# Altium PCB Neural Stimulator.PcbDoc
Units mm, origin at the board's own origin, x right, y up, seen from the top; angles counter-clockwise.
Board outline 29.05 x 31.12 mm, 2 copper layers (Top Layer, Bottom Layer); 58 components, 48 nets, 241 pads, 52 vias.
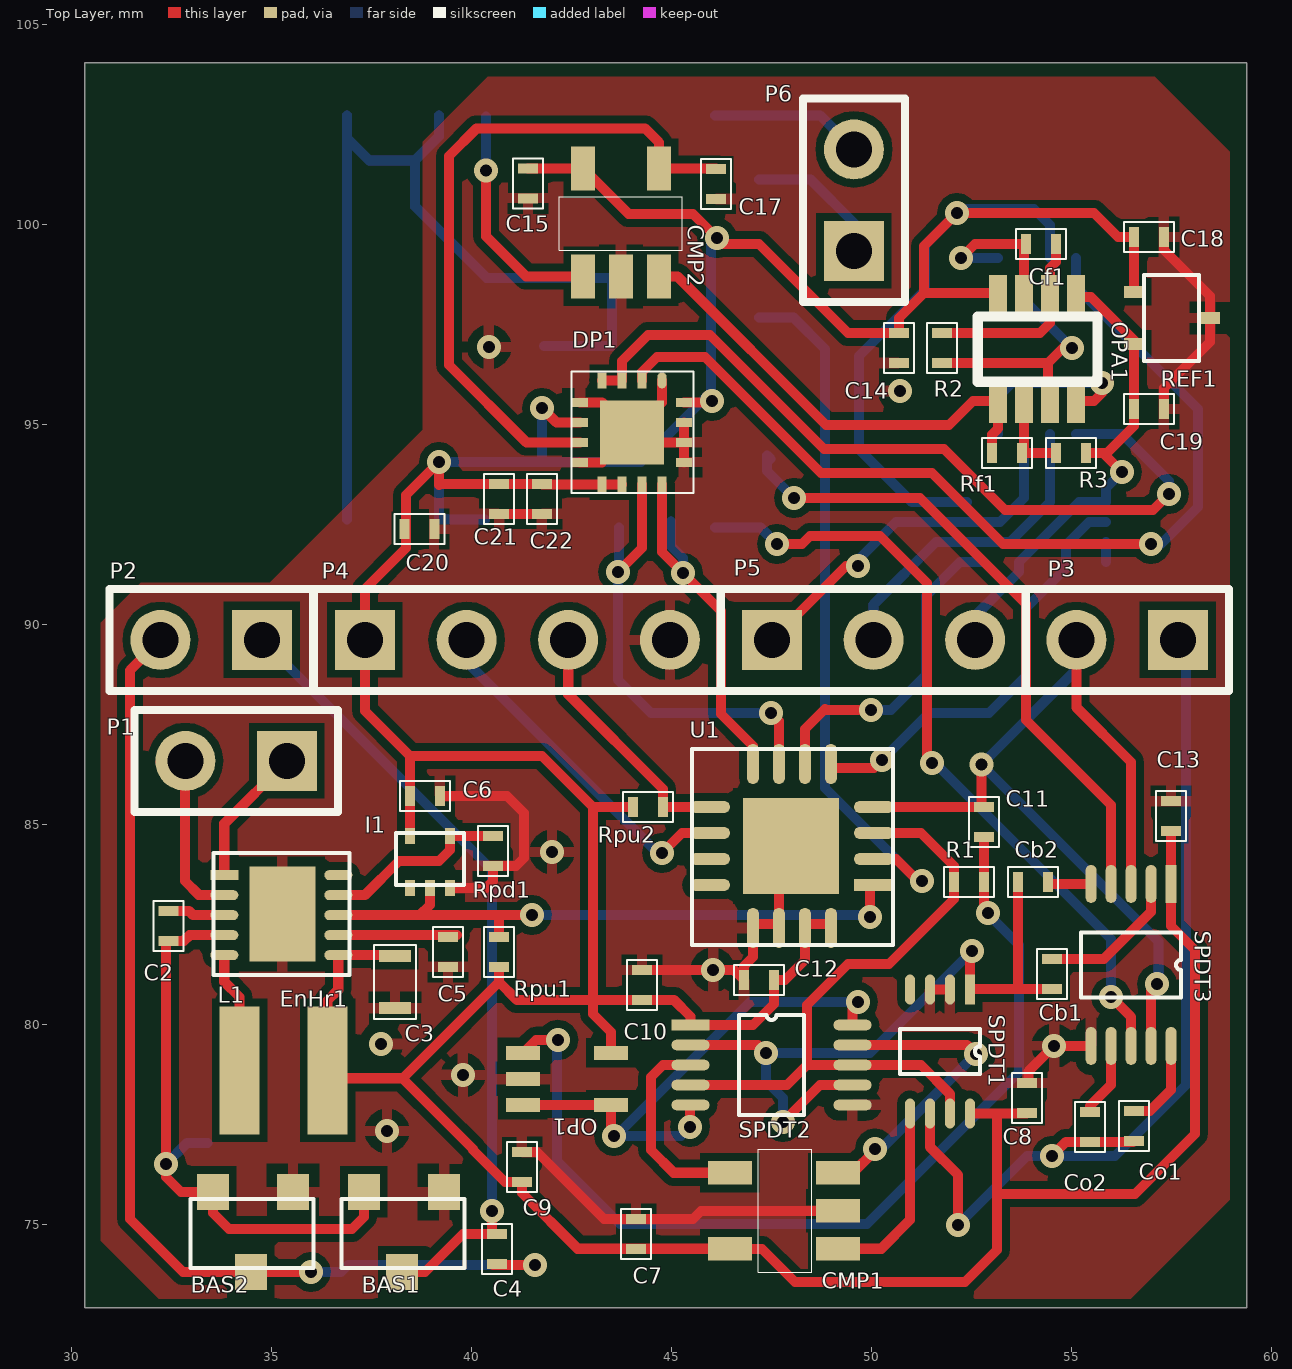
[diagram p0: Top Layer view]
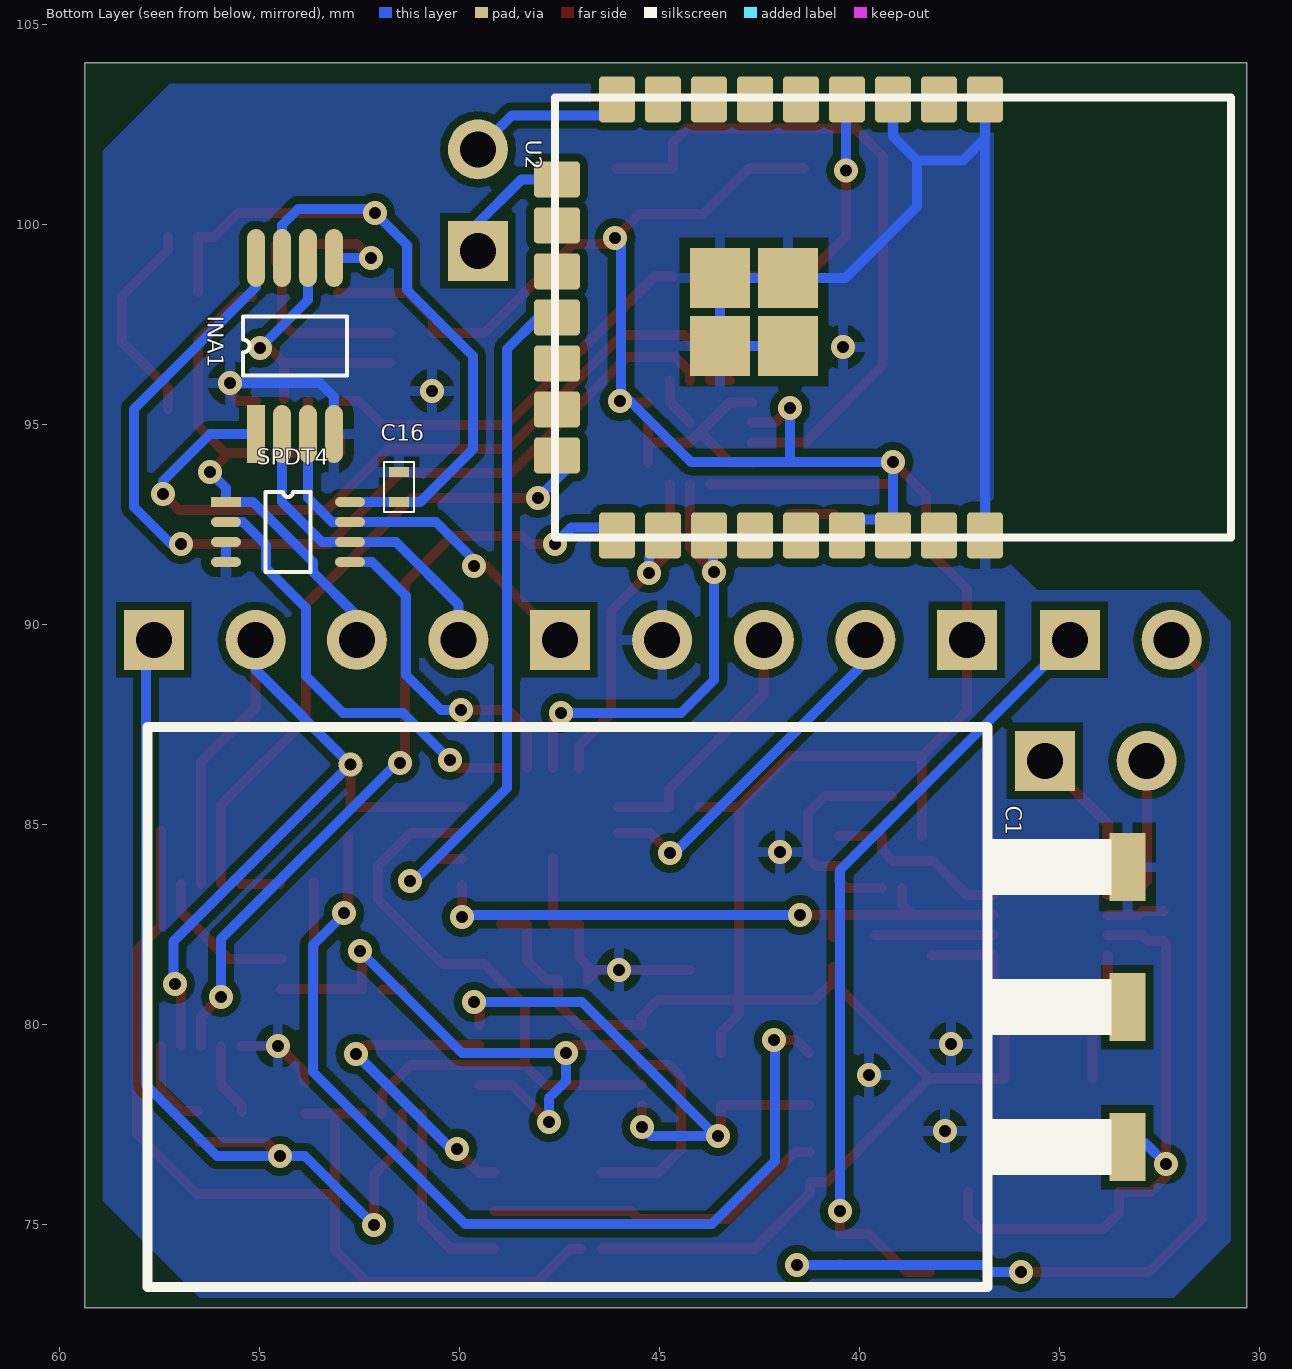
[diagram p1: Bottom Layer view, seen from below]

## Layer stack, top to bottom
Top Solder: solder mask 0.0102, Solder Resist, Dk 3.5
Top Layer: signal copper 0.0356
Dielectric 1: dielectric 0.32, FR-4, Dk 4.8
Bottom Layer: signal copper 0.0356
Bottom Solder: solder mask 0.0102, Solder Resist, Dk 3.5

## Board outline
30.325,72.925 59.375,72.925 59.375,104.05 30.325,104.05

## Design rules (kind name [scope] priority, off if disabled: settings)
Clearance [All] p1: gap=0.2 except(0.1: SMDPad-SMDPad THPad-THPad SMDPad-THPad; 0.254: Poly-Poly)
HoleToHoleClearance [All] p1: gap=0.2 allowstackedmicrovias=TRUE
MinimumSolderMaskSliver [All] p1: minsoldermaskwidth=0.1
PolygonConnect [All] p1: connectstyle=Relief reliefconductorwidth=0.254 reliefentries=4 polygonreliefangle="90 Angle" airgapwidth=0.254
RoutingTopology [All] p1: topology=Daisy_Simple
RoutingVias [All] p1: holewidth=0.3 width=0.6 viastyle="Through Hole" minholewidth=0.3 minwidth=0.6 maxholewidth=3 maxwidth=6
SilkToSilkClearance [All] p1: silktosilkclearance=0
SilkToSolderMaskClearance [All] p1: minsilkscreentomaskgap=0 clearancetoexposedcopper=FALSE
SolderMaskExpansion [All] p1: expansion=0.05
UnpouredPolygon [All] p1: allowunpoured=FALSE
Width [All] p1: maxlimit=0.6 minlimit=0.2 preferedwidth=0.2
24 further rules are at their usual default settings.

## Components (designator, comment, footprint, x,y, rotation, side; value= is the part's Value field where it differs from the comment)
BAS1 "BAS70-04" SOT23 37.3,75.825 r270 top
BAS2 "BAS70-04" SOT23 33.525,75.825 r270 top
C1 "Super Cap" DMT334R2S474M3DTA0 33.302,76.952 r180 bottom
C2 "1uF" 0402 32.411,82.477 r270 top
C3 "47uF" 0603 38.075,81.075 r90 top
C4 "X F" 0402 40.625,74.4 r90 top
C5 "4.7uF" 0402 39.4,81.825 r90 top
C6 "0.1uF" 0402 38.825,85.725 r0 top
C7 "0.1uF" 0402 44.1,74.775 r270 top
C8 "0.1uF" 0402 53.877,78.177 r90 top
C9 "0.1uF" 0402 41.25,76.45 r90 top
C10 "0.1uF" 0402 44.252,81.002 r270 top
C11 "33pF" 0402 52.8,85.075 r270 top
C12 "0.1uF" 0402 47.175,81.125 r180 top
C13 "0.1uF" 0402 57.475,85.225 r90 top
C14 "0.1uF" 0402 50.675,96.925 r270 top
C15 "0.1uF" 0402 41.4,101.04 r270 top
C16 "0.1uF" 0402 51.525,93.45 r90 bottom
C17 "680pF" 0402 46.1,101.025 r90 top
C18 "1uF" 0402 56.925,99.7 r180 top
C19 "0.1uF" 0402 56.925,95.4 r180 top
C20 "0.1uF" 0402 38.683,92.396 r0 top
C21 "0.1uF" 0402 40.675,93.15 r270 top
C22 "10uF" 0402 41.75,93.15 r270 top
Cb1 "20nF" 0402 54.502,81.277 r90 top
Cb2 "10nF" 0402 54.025,83.575 r0 top
Cf1 "680pF" 0402 54.225,99.525 r180 top
CMP1 "TLV3491" SOT-23-5 49.146,74.406 r90 top
CMP2 "TLV3491" SOT-23-5 42.775,98.715 r0 top
Co1 "200nF" 0402 56.552,77.477 r270 top
Co2 "100nF" 0402 55.452,77.452 r270 top
DP1 "AD5142A" LFCSP-16 44.75,96.115 r270 top
EnHr1 "LTC3588-1" DFN-10 33.808,83.747 r0 top
I1 "SN74AUP1G06" "SOT-5X3 (5)" 38.45,83.425 r0 top
INA1 "INA333" VSSOP8 55.1,94.775 r90 bottom
L1 "10uH" "WE-TPC SMD" 34.189,78.867 r270 top
OP1 "OPA369" SC70-5 41.275,79.3 r270 top
OPA1 "OPA2369" SOT-23-8 53.15,95.6 r0 top
P1 "Source" HDR1X2 35.375,86.6 r180 top
P2 "Patch" HDR1X2 34.75,89.625 r180 top
P3 "Stimulator" HDR1X2 57.65,89.625 r180 top
P4 "Test" HDR1X4 37.325,89.625 r0 top
P5 "Recorder" HDR1X3 47.5,89.625 r0 top
P6 "Prog" HDR1X2 49.55,99.35 r90 top
R1 "10M" 0402 52.425,83.575 r180 top
R2 "390K" 0402 51.75,96.925 r270 top
R3 "100K" 0402 54.975,94.3 r0 top
REF1 "REF3312" SC70(3) 56.55,98.325 r270 top
Rf1 "1M" 0402 53.375,94.3 r0 top
Rpd1 "1M" 0402 40.525,84.35 r270 top
Rpu1 "1M" 0402 40.675,81.825 r90 top
Rpu2 "1M" 0402 44.4,85.45 r180 top
SPDT1 "TS5A2053" VSSOP-8-DCU 52.448,80.889 r270 top
SPDT2 "TS3A24159" VSSOP10 45.463,80 r0 top
SPDT3 "TS3A24159" VSSOP10 57.477,83.527 r270 top
SPDT4 "TS5A2053" VSSOP-8-DCU 55.85,93.075 r180 bottom
U1 "MSP430F2013" "QFN(RSA) -16" 49.95,83.5 r180 top
U2 "CC2650MODA" CC2650MODA 36.875,102.74 r270 bottom

## Footprints (in the part's own frame and the unit in brackets; to place one, negate y for a bottom-side part, rotate by r counter-clockwise, add the part's x,y. Pads: shape width x height; smd on the part's side, far side on the other; paste and mask are expansions set on the pad)
0402 [mm]
  rect 0.25x0.5 smd: 1(-0.375,0) 2(0.375,0)
  silkscreen extent -0.63,-0.38 0.63,0.38
0603 [mm]
  rect 0.3x0.8 smd: 1(-0.65,0) 2(0.65,0)
  silkscreen extent -0.92,-0.53 0.92,0.53
CC2650MODA [mm]
  rrect20% 1.15x0.9 smd mask+0.06: 1(-0.4,0) 2(-0.4,-1.15) 3(-0.4,-2.3) 4(-0.4,-3.45) 5(-0.4,-4.6) 6(-0.4,-5.75) 7(-0.4,-6.9) 8(-0.4,-8.05) 9(-0.4,-9.2) 17(10.5,-9.2) 18(10.5,-8.05) 19(10.5,-6.9) 20(10.5,-5.75) 21(10.5,-4.6) 22(10.5,-3.45) 23(10.5,-2.3) 24(10.5,-1.15) 25(10.5,0)
  rrect20% 0.9x1.15 smd mask+0.06: 10(1.6,-10.7) 11(2.75,-10.7) 12(3.9,-10.7) 13(5.05,-10.7) 14(6.2,-10.7) 15(7.35,-10.7) 16(8.5,-10.7)
  rect 1.5x1.5 smd mask+0.06: 26(4.065,-4.925) 27(4.065,-6.625) 28(5.765,-6.625) 29(5.765,-4.925)
  silkscreen extent -0.45,-10.75 10.55,6.15
DFN-10 [mm]
  rect 0.7x0.25 smd mask+0.05: 1(0,0)
  oval 0.7x0.25 smd mask+0.05: 2(0,-0.5) 3(0,-1) 4(0,-1.5) 5(0,-2) 6(2.85,-2) 7(2.85,-1.5) 8(2.85,-1) 9(2.85,-0.5) 10(2.85,0)
  rect 1.65x2.38 smd mask+0: 11(1.45,-0.975)
  silkscreen extent -0.28,-2.5 3.13,0.55
DMT334R2S474M3DTA0 [mm]
  rect 0.9x1.7 smd: 1(-0.011,-0.005) 2(-0.011,3.495) 3(-0.011,6.995)
  silkscreen extent -24.51,-3.51 -0.41,10.49
HDR1X2 [mm] "Connector; Header; 2 Position"
  rect 1.5x1.5 hole 0.9: 1(0,0)
  round 1.5 hole 0.9: 2(2.54,0)
  silkscreen extent -1.27,-1.27 3.81,1.27
HDR1X3 [mm] "Connector; Header; 3 Position"
  rect 1.5x1.5 hole 0.9: 1(0,0)
  round 1.5 hole 0.9: 2(2.54,0) 3(5.08,0)
  silkscreen extent -1.27,-1.27 6.35,1.27
HDR1X4 [mm] "Connector; Header; 4 Position"
  rect 1.5x1.5 hole 0.9: 1(0,0)
  round 1.5 hole 0.9: 2(2.54,0) 3(5.08,0) 4(7.62,0)
  silkscreen extent -1.27,-1.27 8.89,1.27
LFCSP-16 [mm]
  oval 0.4x0.23 smd mask+0.05: 1(0,0)
  rect 0.4x0.23 smd mask+0.05: 2(0,-0.5) 3(0,-1) 4(0,-1.5) 9(2.6,-1.5) 10(2.6,-1) 11(2.6,-0.5) 12(2.6,0)
  rect 0.23x0.4 smd mask+0.05: 5(0.55,-2.05) 6(1.05,-2.05) 7(1.55,-2.05) 8(2.05,-2.05) 13(2.05,0.55) 14(1.55,0.55) 15(1.05,0.55) 16(0.55,0.55)
  rect 1.6x1.6 smd mask+0.05: 17(1.3,-0.75)
  silkscreen extent -0.23,-2.26 2.82,0.79
"QFN(RSA) -16" [mm]
  rect 1x0.3 smd: 1(-0.1,0)
  oval 1x0.3 smd: 2(-0.1,-0.65) 3(-0.1,-1.3) 4(-0.1,-1.95) 9(4,-1.95) 10(4,-1.3) 11(4,-0.65) 12(4,0)
  oval 0.3x1 smd: 5(0.975,-3.025) 6(1.625,-3.025) 7(2.275,-3.025) 8(2.925,-3.025) 13(2.925,1.075) 14(2.275,1.075) 15(1.625,1.075) 16(0.975,1.075)
  rect 2.4x2.4 smd mask+0: PAD(1.975,-0.975)
  silkscreen extent -0.58,-3.4 4.45,1.5
SC70(3) [mm]
  rect 0.3x0.5 smd mask+0.1: 1(0,0) 2(1.3,0) 3(0.65,1.9)
  silkscreen extent -0.42,0.25 1.73,1.62
SC70-5 [mm]
  rect 0.35x0.85 smd: 1(0,0) 2(0.65,0) 3(1.3,0) 4(1.3,2.2) 5(0,2.2)
SOT23 [mm]
  rect 0.9x0.8 smd: 1(0,2) 2(0,0) 3(2,0.95)
  silkscreen extent 0.18,-0.56 1.91,2.51
"SOT-5X3 (5)" [mm]
  rect 0.25x0.4 smd mask+0.05: 1(0,0) 2(0.5,0) 3(1,0) 4(1,1.3) 5(0,1.3)
  silkscreen extent -0.35,0.07 1.35,1.37
SOT-23-5 [mm]
  rect 0.599x1.1 smd: 1(0,0) 2(0.95,0) 3(1.9,0) 4(1.9,2.7) 5(0,2.7)
  silkscreen extent -0.59,0.66 2.48,1.99
SOT-23-8 [mm]
  rect 0.45x1.1 smd mask+0.06: 1(0,0) 2(0.65,0) 3(1.3,0) 4(1.95,0) 5(1.95,2.6) 6(1.3,2.6) 7(0.65,2.6) 8(0,2.6)
  silkscreen extent -0.51,0.48 2.49,2.11
VSSOP8 [mm]
  rect 1.45x0.45 smd mask+0.05: 1(0,0)
  oval 1.45x0.45 smd mask+0.05: 2(0,-0.65) 3(0,-1.3) 4(0,-1.95) 5(4.4,-1.95) 6(4.4,-1.3) 7(4.4,-0.65) 8(4.4,0)
  silkscreen extent 1.46,-2.28 2.94,0.33
VSSOP10 [mm]
  rect 0.95x0.27 smd mask+0.06: 1(0,0)
  oval 0.95x0.27 smd mask+0.06: 2(0,-0.5) 3(0,-1) 4(0,-1.5) 5(0,-2) 6(4.05,-2) 7(4.05,-1.5) 8(4.05,-1) 9(4.05,-0.5) 10(4.05,0)
  silkscreen extent 1.21,-2.25 2.84,0.25
VSSOP-8-DCU [mm]
  rect 0.75x0.25 smd mask+0.06: 1(0,0)
  oval 0.75x0.25 smd mask+0.06: 2(0,-0.5) 3(0,-1) 4(0,-1.5) 5(3.1,-1.5) 6(3.1,-1) 7(3.1,-0.5) 8(3.1,0)
  silkscreen extent 0.98,-1.75 2.11,0.25
"WE-TPC SMD" [mm] "WE-TPC SMD Shielded Tiny Power  Inductor"
  rect 3.2x1 smd: 1(0,0) 2(0,2.2)

## Part data
C1: "Super Capacitor"
C2 C3 C4 C5 C6 C7 C8 C9 C10 C11 C12 C13 C14 C15 C16 C17 C18 C19 C20 C21 C22 Cb1 Cb2 Cf1 Co1 Co2: library part Cap, "Capacitor"
L1: library part Inductor, "Inductor"
P1 P2 P3 P6: library part "Header 2", "Header, 2-Pin"
P4: library part "Header 4", "Header, 4-Pin"
P5: library part "Header 3", "Header, 3-Pin"
R1 R2 R3 Rf1 Rpd1 Rpu1 Rpu2: library part Res1, "Resistor"

## Via types
v1: diameter 0.6, hole 0.3, Top Layer to Bottom Layer, 52 vias

## Nets (pads, with @x,y where several pads share a name; then routed paths per layer and width w, separated by ;. In a path a pad name is that pad's centre, name@x,y a point inside that pad or via, vN(x,y) a via of type N, cw(c..) or ccw(c..) an arc to the next point about the centre after c; other vN are vias at no path point)
BUCCAPSEL: SPDT3.4 U2.16 | length 16.2
  Top Layer w0.254: v1(48.05,93.175) 51.2,93.175 53.85,90.525 53.85,87.625 55.977,85.498 SPDT3.4
  Bottom Layer w0.254: U2.16@47.465,94.15 47.375,94.24 47.375,93.85 v1(48.05,93.175)
CMPOUT: CMP1.1 SPDT1.5 | length 4.8
  Top Layer w0.254: CMP1.1 50.231,74.406 50.948,75.123 SPDT1.5
D0: EnHr1.9 I1.4 Rpd1.1 | length 4.7
  Top Layer w0.254: EnHr1.9 37.322,83.247 38.175,84.1 39.175,84.1 39.45,84.375 I1.4 Rpd1.1
D1: EnHr1.8 I1.2 Rpu1.2 U1.1 | length 15.4
  Top Layer w0.254: EnHr1.8 38.697,82.747 ; I1.2 38.95,83 38.697,82.747 ; Rpu1.2 40.675,82.747 ; v1(41.5,82.75) 40.675,82.75 40.675,82.747 ; v1(49.95,82.7) U1.1@49.95,83.5 ; 38.697,82.747 40.675,82.747
  Bottom Layer w0.254: v1(41.5,82.75) 49.9,82.75 v1(49.95,82.7)
GND: BAS1.1 BAS2.1 C1.3 C3.1 C5.1 C6.2 C7.1 C8.2 C9.2 C10.1 C12.2 C13.2 C14.2 C15.2 C16.2 C17.1 C18.1 C19.1 C20.2 C21.2 C22.2 CMP1.2 CMP2.2 DP1.1 DP1.5 DP1.8 DP1.13 DP1.14 DP1.15 DP1.17 EnHr1.11 I1.3 INA1.4 OP1.2 OPA1.4 P4.4 REF1.3 Rpd1.2 SPDT1.2 SPDT1.3 SPDT2.6 SPDT3.6 SPDT4.3 SPDT4.4 U1.13 U1.14 U1.PAD U2.1 U2.3 U2.25 U2.26 U2.27 U2.28 U2.29 | length 65.5
  Top Layer w0.254: C6.2 40.875,85.725 41.3,85.3 41.3,84.175 41.1,83.975 Rpd1.2 40.525,83.6 40.35,83.425 I1.3 ; C21.2@40.65,92.775 C21.2 C22.2 ; C9.2 41.625,76.825 43.3,75.15 C7.1 45.525,75.15 45.725,75.35 CMP1.2@49.14,75.35 ; DP1.8 43.25,94.065 DP1.17 ; DP1.5 43.25,95.565 DP1.17 ; DP1.17@44.25,95.065 44.75,95.565 DP1.1 ; C10.1 v1(46.025,81.377) 46.548,81.377 C12.2 46.8,81.475 47.025,81.7 U1.13 47.025,82.525 47.675,82.525 U1.PAD@47.675,84.175 ; DP1.13 DP1.14 ; DP1.15 DP1.14 ; SPDT1.3 SPDT1.2 ; C8.2 53.914,78.589 53.914,78.839 v1(54.552,79.477) SPDT3.6 ; OPA1.4 55.55,95.6 55.75,95.8 v1(55.75,96.05) ; C19.1 57.3,95.925 58.45,97.075 REF1.3 58.45,98.225 57.3,99.375 C18.1 ; DP1.17 44.25,94.565 DP1.14
  Bottom Layer w0.254: U2.25@36.875,92.64 36.875,102.165 ; U2.1@36.875,102.74 36.875,102.165 ; U2.3@39.175,102.74 39.175,102.215 38.575,101.615 ; U2.29 U2.28 U2.27 U2.26 40.365,98.675 38.575,100.465 38.575,101.615 ; INA1.4 53.15,95.7 53.5,96.05 v1(55.75,96.05) ; SPDT4.4 SPDT4.3 ; 36.875,102.165 37.425,101.615 38.575,101.615
  other v1: 37.875,77.35 39.775,78.75 37.725,79.525 42,84.325 50.7,95.85 40.425,96.95
NetBAS1_2: BAS1.2 BAS2.2 C1.1 C2.2 EnHr1.4 | length 15.2
  Top Layer w0.254: C2.2@32.35,82.041 v1(32.35,76.525) 32.35,76.2 32.725,75.825 BAS2.2 33.525,75.3 33.925,74.9 37,74.9 37.3,75.2 BAS1.2 ; C2.2 32.798,82.102 32.943,82.247 EnHr1.4
  Bottom Layer w0.254: v1@32.275,76.45 v1(32.35,76.525) 32.872,77.047 C1.1@33.388,77.047
NetBAS1_3: BAS1.3 C4.2 P2.1 | length 19.9
  Top Layer w0.254: BAS1.3 38.825,73.825 39.775,74.775 40.5,74.775 v1(40.5,75.35)
  Bottom Layer w0.254: P2.1 40.5,83.875 v1@40.5,75.375
NetBAS2_3: BAS2.3 C4.1 P2.2 | length 26.6
  Top Layer w0.254: P2.2 31.45,88.865 31.45,75.15 32.775,73.825 BAS2.3 v1(35.975,73.825) ; C4.1@40.5,74.025 40.525,74 v1(41.575,74)
  Bottom Layer w0.254: v1(35.975,73.825) 36.725,73.825 36.9,74 v1(41.575,74)
NetC2_1: C2.1 EnHr1.3 | length 1.4
  Top Layer w0.254: C2.1 32.925,82.852 33.03,82.747 EnHr1.3
NetC5_2: C5.2 EnHr1.7 | length 3
  Top Layer w0.254: EnHr1.7 C5.2@39.62,82.247
NetC11_2: C11.2 OP1.1 R1.1 | length 24.1
  Top Layer w0.254: OP1.1 41.6,79.625 v1(42.15,79.625) ; C11.2 52.8,82.9 v1(52.9,82.8)
  Bottom Layer w0.254: v1(42.15,79.625) 42.125,79.6 42.125,76.6 43.7,75.025 49.875,75.025 53.675,78.825 53.675,82 52.9,82.775 v1(52.9,82.8)
NetCb1_2: Cb1.2 SPDT3.2 | length 3.7
  Top Layer w0.254: Cb1.2@54.452,81.652 Cb1.2 55.802,81.652 56.977,82.827 SPDT3.2
NetCb2_2: Cb2.2 SPDT3.5 | length 1
  Top Layer w0.254: Cb2.2@54.502,83.527 SPDT3.5
NetCf1_1: Cf1.1 OPA1.6 R2.1 | length 4.8
  Top Layer w0.254: R2.1 54.2,97.3 54.45,97.55 OPA1.6 54.45,98.925 54.6,99.075 Cf1.1
NetCf1_2: Cf1.2 INA1.5 OPA1.7 | length 4
  Top Layer w0.254: v1(52.225,99.175) 52.575,99.525 Cf1.2 ; OPA1.7 Cf1.2@53.8,99.475
  Bottom Layer w0.254: v1(52.225,99.175) INA1.5
NetCMP1_3: CMP1.3 SPDT2.9 | length 7.9
  Top Layer w0.254: CMP1.3 49.521,76.306 50.075,76.86 v1(50.075,76.905) ; SPDT2.9 52.379,79.5 v1(52.602,79.277)
  Bottom Layer w0.254: v1(50.075,76.905) 50.23,76.905 v1(52.602,79.277)
NetCMP1_4: CMP1.4 SPDT2.3 | length 5.1
  Top Layer w0.254: SPDT2.3 44.775,79 44.475,78.7 44.475,76.875 45.044,76.306 CMP1.4
NetCo1_1: Co1.1 SPDT3.10 | length 2.2
  Top Layer w0.254: Co1.1 56.952,77.852 57.477,78.377 SPDT3.10
NetCo2_1: Co2.1 SPDT3.7 | length 1.9
  Top Layer w0.254: Co2.1 55.452,77.977 55.977,78.502 SPDT3.7
NetEnHr1_1: EnHr1.1 P1.1 | length 3.5
  Top Layer w0.254: EnHr1.1 33.808,85.033 P1.1
NetEnHr1_2: EnHr1.2 P1.2 | length 4.4
  Top Layer w0.254: P1.2@32.21,86.575 32.825,85.96 32.825,83.6 33.172,83.254 ; 33.165,83.247 EnHr1.2
NetEnHr1_5: EnHr1.5 L1.1 | length 3.2
  Top Layer w0.254: EnHr1.5 33.808,81.08 34.189,80.699 L1.1 L1.1@34.189,78.667
NetINA1_6: INA1.6 OPA1.3 R2.2 | length 7.1
  Top Layer w0.254: R2.2 54.4,96.55 ; OPA1.3@54.4,95.65 54.4,96.55 ; v1(55,96.925) 54.775,96.925 54.4,96.55
  Bottom Layer w0.254: INA1.6 53.8,98.125 v1(55,96.925)
NetOPA1_2: OPA1.2 R3.1 Rf1.2 | length 2.1
  Top Layer w0.254: OPA1.2 53.8,94.3 R3.1
NetP6_1: P6.1 U2.10 | length 3.5
  Bottom Layer w0.254: U2.10@47.175,101.14 U2.10 48.46,101.14 49.55,100.05 P6.1
NetP6_2: P6.2 U2.9 | length 3.8
  Bottom Layer w0.254: U2.9@46.075,102.74 48.7,102.74 P6.2
OUTCAPSEL: SPDT3.8 U2.17 | length 19.8
  Top Layer w0.254: v1(47.625,92.025) 48.25,92.025 48.45,92.225 50.2,92.225 50.575,91.85 51.375,91.05 51.375,86.675 v1(51.5,86.55) ; v1(55.977,80.702) 56.477,80.202 SPDT3.8
  Bottom Layer w0.254: U2.17@46.075,92.44 47.21,92.44 v1(47.625,92.025) ; v1(51.5,86.55) 51.575,86.55 55.977,82.148 v1(55.977,80.702)
RG1: DP1.2 INA1.8 | length 24.1
  Top Layer w0.254: DP1.2 44.25,96.325 44.625,96.7 45.825,96.7 48.725,93.8 51.5,93.8 53.275,92.025 v1(56.975,92.025)
  Bottom Layer w0.254: INA1.8 55.1,98.45 58.15,95.4 58.15,92.95 57.225,92.025 v1(56.975,92.025)
RG2: DP1.3 DP1.4 INA1.1 | length 20
  Top Layer w0.254: DP1.4 DP1.3 43.75,96.6 44.4,97.25 45.95,97.25 48.8,94.4 51.8,94.4 53.325,92.875 57.025,92.875 v1(57.425,93.275)
  Bottom Layer w0.254: INA1.1 56.25,94.775 57.425,93.6 v1(57.425,93.275)
SCL: DP1.11 U1.7 U2.19 | length 11.6
  Top Layer w0.254: v1(43.65,91.325) 44.25,91.925 DP1.11 ; U1.7@47.675,86.425 U1.7 v1@47.675,87.6
  Bottom Layer w0.254: v1(43.65,91.325) 43.65,88.625 44.475,87.8 v1(47.475,87.8) ; v1@43.675,91.3 U2.19@43.675,92.44
SDA: DP1.12 U1.8 U2.18 | length 9.4
  Top Layer w0.254: DP1.12 44.75,91.825 v1(45.275,91.3) 46.225,90.35 46.225,87.775 47.025,86.975 U1.8 U1.8@47.025,86.425
  Bottom Layer w0.254: U2.18@44.975,92.59 44.975,91.975 45.275,91.675 v1(45.275,91.3)
SPDT2E\N\\: SPDT4.2 U1.5 | length 10.8
  Top Layer w0.254: U1.5@48.975,86.425 50.05,86.425 v1(50.25,86.625)
  Bottom Layer w0.254: v1(50.25,86.625) 51.425,87.8 52.925,87.8 53.85,88.725 53.85,90.425 54.85,91.425 54.85,92 55.425,92.575 SPDT4.2
SPDT2IN: SPDT4.5 U1.6 | length 8.3
  Top Layer w0.254: U1.6@48.325,86.425 U1.6 48.325,87.4 48.825,87.9 48.85,87.875 v1(49.975,87.875)
  Bottom Layer w0.254: v1(49.975,87.875) 50.475,87.875 51.35,88.75 51.35,90.725 52.2,91.575 SPDT4.5
T1: R1.2 SPDT1.7 SPDT2.4 SPDT2.8 U1.3 | length 17
  Top Layer w0.254: SPDT2.4 47.875,78.5 48.375,79 ; U1.3@49.95,84.8 U1.3 51.225,84.8 52.05,83.975 R1.2 52.05,83.15 50.425,81.525 49.4,81.525 48.375,80.5 48.375,79 ; SPDT1.7 51.948,78.277 51.225,79 SPDT2.8 48.375,79
T2: C11.1 P3.2 SPDT3.3 SPDT3.9 U1.4 | length 23.5
  Top Layer w0.254: U1.4@49.95,85.45 U1.4 52.739,85.45 v1(52.739,86.511) ; P3.2 55.11,87.94 56.477,86.573 SPDT3.3 ; SPDT3.9 56.977,80.877 v1(57.125,81.025)
  Bottom Layer w0.254: P3.2 55.11,88.881 v1(52.739,86.511) 57.164,82.086 v1@57.164,81.064
TEST: P4.2 U1.10 | length 8.9
  Top Layer w0.254: v1(44.75,84.3) 45.25,84.8 U1.10 U1.10@46.05,84.8
  Bottom Layer w0.254: P4.2 39.865,89.075 44.64,84.3 v1(44.75,84.3)
"U1 R\E\S\E\T\\": P4.3 Rpu2.1 U1.9 | length 6.6
  Top Layer w0.254: P4.3@41.855,89.625 42.405,89.075 42.405,88.27 44.75,85.925 ; 44.775,85.9 Rpu2.1 U1.9@46.05,85.45
"U2 R\E\S\E\T\\": U1.2 U2.13 | length 17.8
  Top Layer w0.254: U1.2@49.95,84.15 U1.2 50.6,84.15 v1@51.15,83.6
  Bottom Layer w0.254: U2.13@47.175,97.69 U2.13 48.035,97.69 48.825,96.9 48.825,85.925 51.15,83.6 v1(51.25,83.6)
VCB: Cb1.1 Cb2.1 SPDT1.1 SPDT2.2 SPDT2.7 | length 18.1
  Top Layer w0.254: SPDT2.2 47.15,79.5 v1(47.35,79.3) v1@47.375,79.275 ; v1(47.775,77.575) 48.7,78.5 SPDT2.7 ; SPDT1.1 52.448,81.952 52.5,81.9 v1(52.5,81.85) ; SPDT1.1@52.461,80.902 Cb1.1@54.477,80.902 ; 53.65,80.927 Cb2.1
  Bottom Layer w0.254: v1(47.775,77.575) 47.775,78.175 47.35,78.6 v1(47.35,79.3) 49.95,79.3 v1(52.5,81.85)
VCC: C3.2 C6.1 C7.2 C8.1 C9.1 C10.2 C12.1 C13.1 C14.1 C15.1 C16.1 C18.2 C20.1 C21.1 C22.1 CMP1.5 CMP2.5 DP1.6 DP1.9 DP1.10 DP1.16 EnHr1.6 I1.5 INA1.7 L1.2 OP1.5 OPA1.8 P4.1 REF1.1 Rpu1.1 Rpu2.2 SPDT1.8 SPDT2.1 SPDT3.1 SPDT4.8 U1.15 U1.16 U2.22 U2.23 | length 137.7
  Top Layer w0.254: C3.2@38.215,81.747 EnHr1.6 36.658,80.882 36.389,80.613 L1.2 36.389,78.667 38.258,78.667 38.263,78.663 ; I1.5 C6.1 38.45,86.725 ; 39.175,93.5 v1@39.175,94.065 ; v1(39.175,94.075) 38.35,93.25 38.35,91.925 37.325,90.9 P4.1 37.325,87.85 38.45,86.725 ; 39.185,93.525 C21.1 C22.1 ; Rpu1.1 40.675,81.075 ; C15.1 CMP2.5 43.915,100.275 45.525,100.275 v1(46.125,99.675) 46.275,99.525 47.175,99.525 49.4,97.3 C14.1 50.675,97.675 51.3,98.3 ; v1(41.75,95.425) 42.11,95.065 DP1.6 ; C22.1@41.76,93.515 DP1.9 DP1.10 ; OP1.5 43.475,79.825 43.025,80.275 43.025,80.627 ; Rpu2.2 43.025,85.45 ; DP1.16 v1@46,95.565 ; CMP1.5 42.644,74.406 41.25,75.8 C9.1 40.825,76.075 40.027,76.873 40.027,76.898 39.211,77.714 38.263,78.663 ; CMP1.5@46.975,74.4 47.25,74.4 48.075,73.575 52.325,73.575 53.125,74.375 53.125,75.775 ; U1.16@48.975,82.525 48.325,82.525 U1.15 48.325,81.625 47.825,81.125 C12.1 47.55,80.525 47.025,80 SPDT2.1 45.463,80.212 45.048,80.627 C10.2 43.025,80.627 ; SPDT1.8 C8.1@53.864,77.789 ; OPA1.8@53.05,98.3 51.3,98.3 ; 53.125,77.764 53.125,75.775 ; REF1.1 C18.2 56.15,99.7 55.55,100.3 v1(52.125,100.3) 51.3,99.475 51.3,98.3 ; C13.1@57.477,84.852 SPDT3.1 57.477,82.473 58.075,81.875 58.075,77.275 56.575,75.775 53.125,75.775 ; 38.263,78.663 40.675,81.075 ; 38.45,86.725 41.75,86.725 43.025,85.45 ; 40.675,81.075 41.123,80.627 43.025,80.627 ; 43.025,80.627 43.025,85.45
  Bottom Layer w0.254: U2.22@40.325,92.64 39.175,92.64 v1(39.175,94.075) 41.75,94.075 ; v1(41.75,95.425) 41.75,94.075 ; v1@45.85,95.7 44.225,94.075 41.75,94.075 ; v1@45.975,95.6 v1@45.975,99.675 ; v1@46.025,99.675 v1(46.125,99.675) ; SPDT4.8@52.375,93.075 C16.1 50.997,93.075 49.675,94.397 49.675,96.725 51.325,98.375 51.325,99.5 v1(52.125,100.3) 52.225,100.4 54.05,100.4 54.45,100 INA1.7
  other v1: 46,95.6
VIN: INA1.3 P5.1 SPDT4.7 | length 9.5
  Top Layer w0.254: P5.1 49.35,91.475 v1(49.65,91.475)
  Bottom Layer w0.254: v1(49.65,91.475) 49.65,91.625 50.6,92.575 SPDT4.7 53.2,92.575 53.8,93.175 INA1.3
VO: Co1.2 Co2.2 P3.1 SPDT1.6 | length 23.7
  Top Layer w0.254: SPDT1.6 51.448,76.956 52.15,76.254 v1(52.15,75) ; v1(54.5,76.725) 54.852,77.077 Co2.2 Co1.2@56.527,77.077
  Bottom Layer w0.254: v1(52.15,75) 53.875,76.725 v1(54.5,76.725) 56.075,76.725 57.85,78.5 57.85,89.3 P3.1@58.175,89.625
VOUT: CMP2.3 OPA1.1 Rf1.1 | length 11.6
  Top Layer w0.254: CMP2.3 45.135,98.715 48.85,95 51.925,95 52.525,95.6 OPA1.1 53.15,94.91 53,94.76 Rf1.1
VREC: CMP2.1 U2.4 | length 5.8
  Top Layer w0.254: v1(40.35,101.365) 40.35,99.715 41.35,98.715 CMP2.1
  Bottom Layer w0.254: v1(40.35,101.365) U2.4@40.35,102.715
VREF: OP1.3 OP1.4 SPDT2.5 SPDT2.10 | length 13.6
  Top Layer w0.254: OP1.3 OP1.4 43.475,77.3 v1(43.55,77.225) ; v1(45.45,77.45) SPDT2.5@45.45,77.987 ; SPDT2.10 49.513,80.438 v1(49.65,80.575)
  Bottom Layer w0.254: v1(43.55,77.225) v1@43.6,77.225 ; v1(45.45,77.45) 45.225,77.225 v1@43.6,77.225 ; v1(49.65,80.575) 46.95,80.575 v1@43.6,77.225
VREF1: C19.2 OPA1.5 P5.3 R3.2 REF1.2 SPDT4.1 | length 12.1
  Top Layer w0.254: OPA1.5@55.2,98.2 55.475,98.2 56.55,97.125 REF1.2 C19.2 56.55,94.975 55.875,94.3 R3.2 ; 55.85,94.225 v1(56.25,93.825)
  Bottom Layer w0.254: P5.3 52.58,90.23 53.675,91.325 53.675,91.575 55.175,93.075 SPDT4.1 55.85,93.425 v1(56.25,93.825)
VREF2: INA1.2 P5.2 SPDT4.6 | length 8.1
  Bottom Layer w0.254: P5.2 50.04,90.515 51.6,92.075 SPDT4.6 53.45,92.075 54.45,93.075 INA1.2
VREF3: C17.2 CMP2.4 DP1.7 | length 17.1
  Top Layer w0.254: DP1.7 41.36,94.565 39.425,96.5 39.425,101.725 40.115,102.415 44.325,102.415 44.675,102.065 CMP2.4 C17.2@46.1,101.415
pads on no net: C1.2 EnHr1.10 I1.1 SPDT1.4 U1.11 U1.12 U2.2 U2.5 U2.6 U2.7 U2.8 U2.11 U2.12 U2.14 U2.15 U2.20 U2.21 U2.24

## Polygon pours and split planes (outlines as drawn)
GND on Bottom Layer "Bot_GND" (solid, remove dead copper, pour order 4): 36.65,103.525 57.25,103.525 58.925,101.85 58.925,75.6 56.5,73.175 32.15,73.175 30.725,74.6 30.725,90.075 31.53,90.879 35.571,90.872 36.65,91.949
GND on Top Layer "Top_GND" (solid, remove dead copper, pour order 2): 40.4,103.7 57.075,103.7 58.95,101.825 58.95,75.625 56.475,73.15 32.175,73.15 30.725,74.6 30.725,90.05 31.725,91.05 34.95,91.05 38.775,94.875 38.775,102.075

## Silkscreen, mask and mechanical layers (free items; w line width, h text height)
Mechanical 1:
  lines w0.254: 30.325,74.825 ccw(c32.225,74.825) 32.225,72.925 56.45,72.925 ccw(c56.562,75.738) 59.375,75.625 59.375,101.775 ccw(c57.188,101.862) 57.275,104.05 31.875,104.075 ccw(c31.887,102.512) 30.325,102.5 30.325,74.825

## Dimensions
30.325,72.925 to 59.375,72.925 on Top Overlay
30.325,72.925 to 30.325,104.05 on Top Overlay